# Altium PCB MCU.PcbDoc
Units mil, origin at the board's own origin, x right, y up, seen from the top; angles counter-clockwise.
Board outline 5055 x 2000 mil, 2 copper layers (Top Layer, Bottom Layer); 32 components, 26 nets, 142 pads, 0 vias.
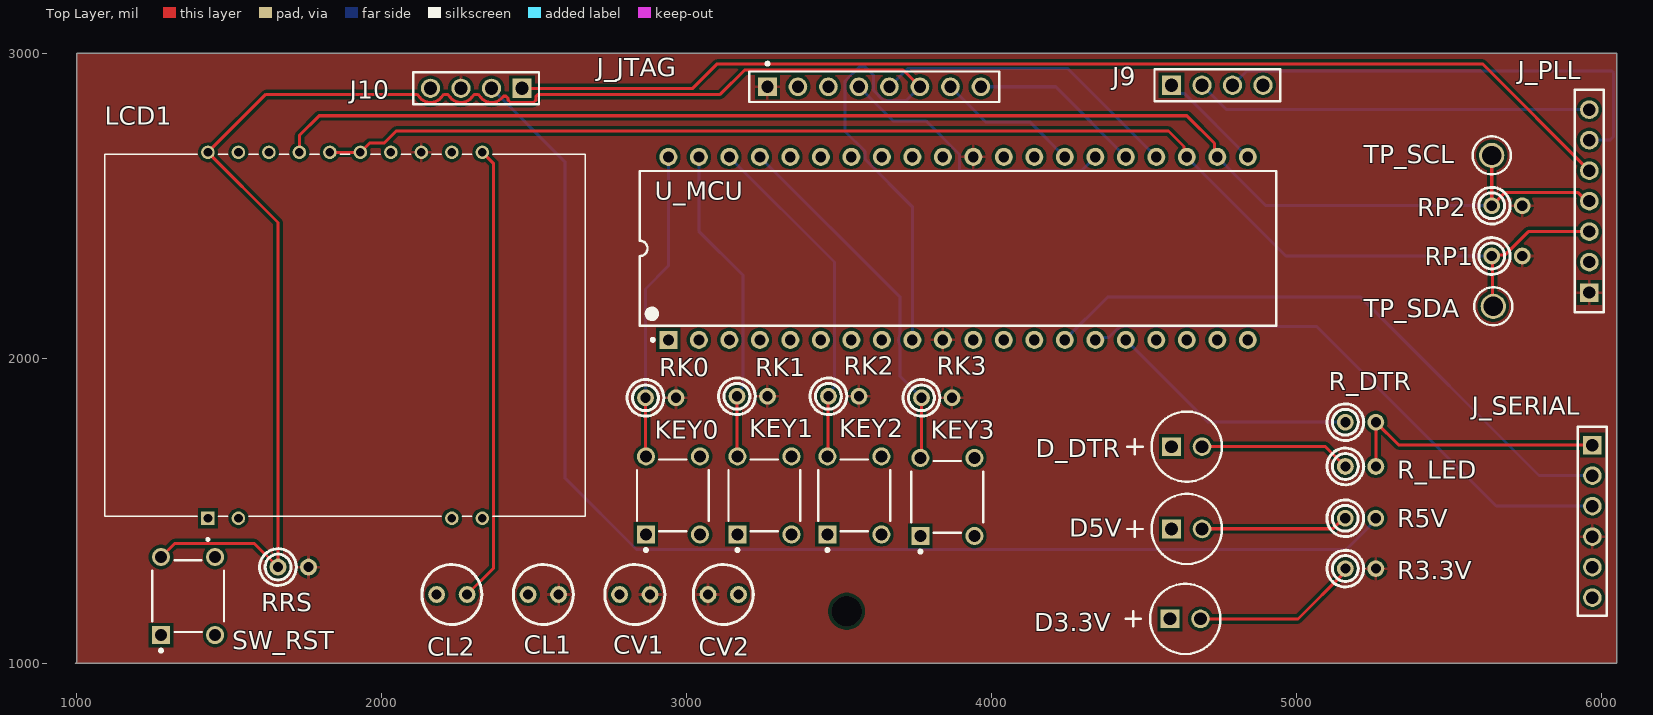
[diagram p0: Top Layer view]
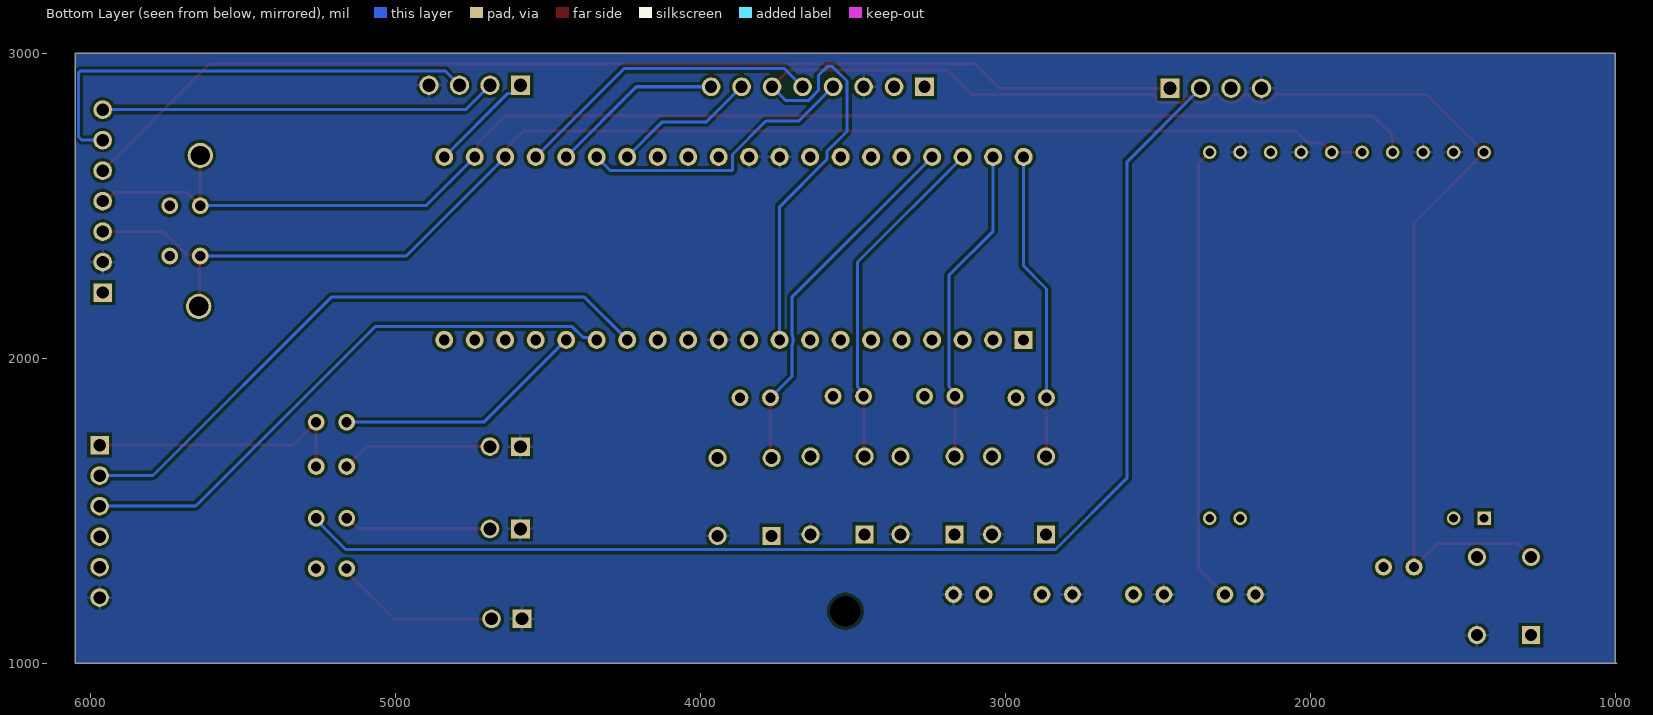
[diagram p1: Bottom Layer view, seen from below]

## Layer stack, top to bottom
Top Solder: solder mask 0.4, Solder Resist, Dk 3.5
Top Layer: signal copper 1.4
Dielectric 1: dielectric 12.6, FR-4, Dk 4.8
Bottom Layer: signal copper 1.4
Bottom Solder: solder mask 0.4, Solder Resist, Dk 3.5

## Board outline
1000,1000 1000,3000 6050,3000 6050,1000 995,1000

## Design rules (kind name [scope] priority, off if disabled: settings)
Clearance [All] p1: gap=10 ignorepadtopadclearanceinfootprint=FALSE except(0: Arc-Hole Track-Hole SMDPad-Hole THPad-Hole Via-Hole Fill-Hole Poly-Hole Region-Hole Text-Hole)
PolygonConnect [All] p1: connectstyle=Relief reliefconductorwidth=10 reliefentries=4 polygonreliefangle="90 Angle" airgapwidth=10
RoutingVias [All] p1: holewidth=28 width=50 viastyle="Through Hole" minholewidth=28 minwidth=50 maxholewidth=28 maxwidth=50
SolderMaskExpansion [All] p1: expansion=4 istentingtop=FALSE
Width [All] p1: maxlimit=10 minlimit=10 preferedwidth=10
30 further rules are at their usual default settings.

## Classes and differential pairs
component class U_Output: CL1 CL2 J_PLL LCD1 RP1 RP2 TP_SCL TP_SDA
component class U_Input: D_DTR J_SERIAL KEY0 KEY1 KEY2 KEY3 R_DTR R_LED RK0 RK1 RK2 RK3
component class MCU: CV1 CV2 D3.3V D5V J9 J10 J_JTAG R3.3V R5V RRS SW_RST U_MCU

## Components (designator, comment, footprint, x,y, rotation, side; value= is the part's Value field where it differs from the comment)
CL1 "Cap" RADIAL-0.1 2530,1225 r0 top value=1UF
CL2 "Cap" RADIAL-0.1 2230,1225 r0 top value=1UF
CV1 "Cap" RADIAL-0.1 2830,1225 r0 top value=0.1UF
CV2 "Cap" RADIAL-0.1 3120,1225 r180 top value=0.1UF
D3.3V "HLMP-3301" AVAG-HLMP-3301-2 4585,1145 r0 top
D5V "HLMP-3301" AVAG-HLMP-3301-2 4590,1440 r0 top
D_DTR "HLMP-3301" AVAG-HLMP-3301-2 4590,1710 r0 top
J9 "LO_F1" 61300411121 4740,2895 r0 top
J10 "LO_F2" 61300411121 2310,2885 r180 top
J_JTAG "PRPC008SAAN-RC" SLIN-PPPC081LFBN-RC_V 3615,2890 r0 top
J_PLL "PPTC071LFBN-RC" SMTC-SSQ-107-01-X-S 5960,2215 r90 top
J_SERIAL "SSW-106-02-T-S" SMTC-SSW-106-02-X-S 5970,1715 r270 top
KEY0 "1825910-6" TECO-1825910-6_V 2955,1550 r90 top
KEY1 "1825910-6" TECO-1825910-6_V 3255,1550 r90 top
KEY2 "1825910-6" TECO-1825910-6_V 3550,1550 r90 top
KEY3 "1825910-6" TECO-1825910-6_V 3855,1545 r90 top
LCD1 "EA_DOGS164W-A" LCD_EA_DOGS164W-A 1880,2075 r90 top
R3.3V "Res1" AXIAL-0.1-RES 5210,1310 r0 top value=1K
R5V "Res1" AXIAL-0.1-RES 5209.51,1475 r0 top value=1K
R_DTR "10" AXIAL-0.1-RES 5210,1790 r0 top
R_LED "Res1" AXIAL-0.1-RES 5210,1645 r0 top value=1K
RK0 "PULLUP" AXIAL-0.1-RES 2915,1870 r0 top value=10K
RK1 "PULLUP" AXIAL-0.1-RES 3215,1875 r0 top value=10K
RK2 "PULLUP" AXIAL-0.1-RES 3515,1875 r0 top value=10K
RK3 "PULLUP" AXIAL-0.1-RES 3820,1870 r0 top value=10K
RP1 "PULLUP" AXIAL-0.1-RES 5690,2335 r0 top value=1.8K
RP2 "PULLUP" AXIAL-0.1-RES 5690,2500 r0 top value=1.8K
RRS "PULLUP" AXIAL-0.1-RES 1710,1315 r0 top value=10K
SW_RST "1825910-6" TECO-1825910-6_V 1365,1220 r90 top
TP_SCL "5011" KSTN-5011_V 5640,2665 r90 top
TP_SDA "5010" KSTN-5010_V 5645,2170 r90 top
U_MCU "ATmega324A-PU" 40P6 3890,2360 r90 top

## Footprints (in the part's own frame and the unit in brackets; to place one, negate y for a bottom-side part, rotate by r counter-clockwise, add the part's x,y. Pads: shape width x height; smd on the part's side, far side on the other; paste and mask are expansions set on the pad)
40P6 [mm] "40-Pin Ceramic Dual In-Line Package (CerDIP)"
  rect 1.5x1.5 hole 0.9: 1(-7.62,24.13)
  round 1.5 hole 0.9: 2(-7.62,21.59) 3(-7.62,19.05) 4(-7.62,16.51) 5(-7.62,13.97) 6(-7.62,11.43) 7(-7.62,8.89) 8(-7.62,6.35) 9(-7.62,3.81) 10(-7.62,1.27) 11(-7.62,-1.27) 12(-7.62,-3.81) 13(-7.62,-6.35) 14(-7.62,-8.89) 15(-7.62,-11.43) 16(-7.62,-13.97) 17(-7.62,-16.51) 18(-7.62,-19.05) 19(-7.62,-21.59) 20(-7.62,-24.13) 21(7.62,-24.13) 22(7.62,-21.59) 23(7.62,-19.05) 24(7.62,-16.51) 25(7.62,-13.97) 26(7.62,-11.43) 27(7.62,-8.89) 28(7.62,-6.35) 29(7.62,-3.81) 30(7.62,-1.27) 31(7.62,1.27) 32(7.62,3.81) 33(7.62,6.35) 34(7.62,8.89) 35(7.62,11.43) 36(7.62,13.97) 37(7.62,16.51) 38(7.62,19.05) 39(7.62,21.59) 40(7.62,24.13)
  silkscreen extent -7.74,-26.5 6.45,26.5, body extent -7.05,-26.47 7.05,26.47, height 5.72
61300411121 [mm] "Pin Header, pitch 2.54 mm, THT, Vertical, single row, 4p"
  rect 1.6x1.6 hole 1.1: 1(-3.81,0)
  round 1.6 hole 1.1: 2(-1.27,0) 3(1.27,0) 4(3.81,0)
  silkscreen extent -5.23,-1.35 5.23,1.35, body extent -5.08,-1.27 5.08,1.27, height 8.57
AVAG-HLMP-3301-2 [mm] "THD, 2-Leads, Body Dia 5.85mm"
  rect 1.55x1.55 hole 1.05: 1(0,0)
  round 1.55 hole 1.05: 2(2.54,0)
  silkscreen extent -3.68,-2.92 4.19,2.92
AXIAL-0.1-RES [mm] "Axial Device, Thru-Hole; 2 Leads; 0.3 in Pin Spacing"
  round 1.4 hole 0.85: 1(-1.27,0) 2(1.27,0)
  silkscreen extent -2.8,-1.53 0.26,1.53
KSTN-5010_V [mm] "Test Point, Dia 3.17mm"
  round 2.1 hole 1.6: 1(0,0)
  silkscreen extent -1.58,-1.59 1.58,1.59, body extent -1.59,-1.59 1.59,1.59, height 8.13
KSTN-5011_V [mm] "Test Point, Dia 3.17mm"
  round 2.1 hole 1.6: 1(0,0)
  silkscreen extent -1.58,-1.59 1.58,1.59, body extent -1.59,-1.59 1.59,1.59, height 8.13
LCD_EA_DOGS164W-A [mm]
  rect 1.13x1.13 / inner round 1.13 / far side rect 1.13x1.13 hole 0.73: 1(-15.24,11.43)
  round 1.13 hole 0.73: 2(-15.24,8.89) 9(-15.24,-8.89) 10(-15.24,-11.43) 11(15.24,-11.43) 12(15.24,-8.89) 13(15.24,-6.35) 14(15.24,-3.81) 15(15.24,-1.27) 16(15.24,1.27) 17(15.24,3.81) 18(15.24,6.35) 19(15.24,8.89) 20(15.24,11.43)
  silkscreen extent -17.1,-20 15.09,20
RADIAL-0.1 [mm] "Axial Device, Thru-Hole; 2 Leads; 0.3 in Pin Spacing"
  round 1.4 hole 0.85: 1(-1.27,0) 2(1.27,0)
  silkscreen extent -2.5,-2.5 2.5,2.5
SLIN-PPPC081LFBN-RC_V [mm] "THD, 8-Leads, Body 20.82x2.54mm, Pitch 2.54mm"
  rect 1.55x1.55 hole 1.02: 1(-8.89,0)
  round 1.55 hole 1.02: 2(-6.35,0) 3(-3.81,0) 4(-1.27,0) 5(1.27,0) 6(3.81,0) 7(6.35,0) 8(8.89,0)
  silkscreen extent -10.41,-1.27 10.41,2.04, body extent -10.41,-1.27 10.41,1.27, height 8.5
SMTC-SSQ-107-01-X-S [mm] "SQ Post Socket, 1x7 Pins, Vertical, 2.54mm Pitch, Female"
  rect 1.55x1.55 hole 1.02: 1(0,0)
  round 1.55 hole 1.02: 2(2.54,0) 3(5.08,0) 4(7.62,0) 5(10.16,0) 6(12.7,0) 7(15.24,0)
  silkscreen extent -1.65,-1.2 16.89,1.2, body extent -1.52,-1.21 16.76,1.21, height 8.51
SMTC-SSW-106-02-X-S [mm] "SQ Post Socket, 1x6 Pins, Vertical, 2.54mm Pitch, Female"
  rect 1.55x1.55 hole 1.04: 1(0,0)
  round 1.55 hole 1.04: 2(2.54,0) 3(5.08,0) 4(7.62,0) 5(10.16,0) 6(12.7,0)
  silkscreen extent -1.53,-1.2 14.23,1.2, body extent -1.52,-1.21 14.22,1.21, height 8.51
TECO-1825910-6_V [mm] "Switch, 4-Leads, Body 5.99x5.99mm"
  rect 1.5x1.5 hole 0.99: 1(-3.25,2.25)
  round 1.5 hole 0.99: 2(3.25,2.25) 3(-3.25,-2.25) 4(3.25,-2.25)
  silkscreen extent -4.67,-2.99 2.99,3, body extent -3,-2.99 2.99,3, height 5

## Part data
CL1 CL2: library part "CAP ALUM 1UF 20% 100V RADIAL", "Capacitor", Manufacturer Part Number=ESE105M100AC3EA, Voltage Rating=100V, LatestRevisionDate=17-Jul-2002, LatestRevisionNote="Re-released for DXP Platform.", Published=8-Jun-2000, Publisher="Altium Limited"
CV1 CV2: library part "CAP CER 0.1UF 50V X7R RADIAL", "Capacitor", Manufacturer Part Number=K104M15X7RF5TH5, Voltage Rating=50V, LatestRevisionDate=17-Jul-2002, LatestRevisionNote="Re-released for DXP Platform.", Published=8-Jun-2000, Publisher="Altium Limited"
D3.3V D5V D_DTR: library part CMP-2000-06411-1, "T-1 3/4 (5 mm) Diffused LED Lamp, 1.9 V, -40 to 100 degC, 2-Pin THD, RoHS, Bulk", Emitting Color=Red, Forward Current=25mA, Forward Voltage=2.4V, Manufacturer=Avago, Operating Temp Range=-40Cto100C, Operating Temperature Classification=Industrial, Package Description="2-Pin Through Hole LED, Dia 5.85 mm", Package Type=T-13/4, Power Dissipation=85W, Reverse Voltage=5V, Test Current (It)=10mA, Chip Material=GaP, Datasheet URL=http://www.avagotech.com/docs/AV02-1558EN, Datasheet Version=03/2015, DELETED=Compliant, Dominant Wave Length=626nm, High Brightness=No, Lens Dimensions=5.08x5.08x8.3mm, Lens Type=ColoredDiffused, Lum Intensity=5.4mcd, Luminous Intensity=5.4mcd, Main Category=StandardLED, Manufacturer URL=http://www.avagotech.com/, Mounting=ThroughHole, Mounting Technology=ThroughHole, Number of  Elements=1, Package Reference=HLMP-3301, Packaging=TapeandReel, Peak Wavelength=635nm, Pin Count=2, Product Depth (mm)=6.1mm, Product Height (mm)=9.19mm, Product Length (mm)=6.1mm, Rad Hardened=No, Shape Type=Circular, Type=Uni-Color, Viewing Angle=60deg
J9 J10: library part CMP-1502-01064-1, "THT Vertical Pin Header WR-PHD, Pitch 2.54 mm, Single Row, 4 pins", Contact Resistance=20mOhm, Manufacturer="Wurth Elektronik", Operating Temperature=-40to105degC, Package Reference=61300411121, Rated Current=3A, Withstanding Voltage=500VAC, Working Voltage=250VAC, Datasheet URL=https://katalog.we-online.de/em/datasheet/6130xx11121.pdf, Gender=Male, Manufacturer URL=http://www.we-online.de, Mounting Technology=THT, Orientation=Vertical, Packaging=Bag, Part Number=61300411121, Pin Number=4, Pitch=2.54mm, Publisher=WurthElektronik, Row Number=Single
J_JTAG: library part CMP-1770-00002-1, "Female Header, Pitch 2.54 mm, 1 x 8 Position, Height 8.5 mm, Tail Length 3.2 mm, -40 to 105 degC, RoHS, Bulk", Case\Package=TO-252-3, Input Capacitance="350 pF", Max Operating Temperature="150 degC", Max Power Dissipation="2.5 W", Min Operating Temperature="-55 degC", Package Quantity=2500, ComponentLink1Description=Datasheet, ComponentLink1URL=http://sullinscorp.com/catalogs/101_PAGE114-115_.100_FEMALE_HDR.pdf, DatasheetVersion=Jan-15, Elements=1, Height="2.39 mm", Length="6.73 mm", Mount="Surface Mount", PackageDescription="Female Header, Pitch 2.54 mm, 1 x 8 Position, Height 8.5 mm, Tail Length 3.2 mm", PackageReference=PPPC081LFBN-RC, Packaging="Tape and Reel", Pins=3, Radiation Hardening=No, Rds On Max="115 mohm", REACH SVHC="No SVHC", RoHSCompliant=true, Typical Rise Time="90 ns", Width="6.22 mm"
J_PLL: library part CMP-1023-00284-1, "SQ Post Socket, Through-hole, Vertical, -55 to 125 degC, 2.54 mm Pitch, 7-Pin, Female, RoHS", Manufacturer=Samtec, PartNumber=SSQ-107-01-G-S, Temperature Range="-55 to 125 degC", ComponentLink1Description="Manufacturer URL", ComponentLink1URL=http://www.samtec.com, ComponentLink2Description=Datasheet, ComponentLink2URL=http://www.samtec.com/documents/webfiles/pdf/SSQ_TH.PDF, ComponentLink3Description="Package Specification", ComponentLink3URL=http://www.samtec.com/documents/webfiles/cpdf/SSQ-1XX-XX-XXX-X-XX-XXX-XX-X-MKT.pdf, DatasheetVersion=F-214, Mounting Technology=Through-hole, Orientation=Vertical, PackageDescription="Assembly, Socket Strip .025[0.64] SQ Tail", PackageReference=SSQ-107-01-X-S, PackageVersion="BD, 6/1987", Pitch="2.54 mm", RoHS=True
J_SERIAL: library part CMP-1023-00360-1, "SQ Post Socket, Through-hole, Vertical, -55 to 105 degC, 2.54mm Pitch, 6-Pin, Female, RoHS", Manufacturer=Samtec, Temperature Range="-55 to 105 degC", ComponentLink1Description="Manufacturer URL", ComponentLink1URL=http://www.samtec.com, ComponentLink2Description=Datasheet, ComponentLink2URL=http://www.samtec.com/documents/webfiles/pdf/SSW_TH.PDF, ComponentLink3Description="Package Specification", ComponentLink3URL=http://www.samtec.com/documents/webfiles/cpdf/SSW-1XX-XX-XXX-X-XX-XXX-XX-MKT.pdf, DatasheetVersion=F-214, Mounting Technology=Through-hole, Orientation=Vertical, PackageDescription="Assembly, Socket Strip .016 X .031 Tail", PackageReference=SSW-106-02-X-S, PackageVersion="CA, 6/1987", PartNumber=SSW-106-02-T-S, Pitch="2.54 mm", RoHS=True
KEY0 KEY1 KEY2 KEY3 SW_RST: library part CMP-1684-00021-1, "Tact Switch, SPST-NO, 0.05 A, -35 to 85 degC, 4-Pin THD, RoHS, Bulk", Actuator Color=Black, Contact Rating @ Voltage=0.05A@24VDC, Dielectric Strength=500VAC, Manufacturer="TE Connectivity", Maximum AC Voltage Rating=N/A, Maximum Contact Resistance=100mOhm, Maximum DC Voltage Rating=24V, Minimum Insulation Resistance=100MOhm, Operating Temperature=-35to85C, Package Description="4-Pin Through Hole Device, Body 5.99 x 5.99 mm, Pitch 6.5 mm", Package Reference=THD, Actuator Length=1.4mm, Actuator Material=PolybutyleneTerephthalate, Actuator Style=RoundButton, Base Material=N/A, Body Orientation=Straight, Bushing Type=Unthreaded, Contact Material=CopperAlloy, Contact Plating=Silver, Datasheet URL=http://www.te.com/commerce/DocumentDelivery/DDEController?Action=showdoc&DocId=Customer+Drawing%7F1825910%7FC9%7Fpdf%7FEnglish%7FENG_CD_1825910_C9.pdf%7F1825910-6, Datasheet Version="Rev. C9", Dimension=5.99x5mm, Electrical Life=100000Cycles, Family=1825910, Function=MomentaryContact, Housing Material=N/A, Illumination=N/R, Manufacturer URL=http://www.te.com, Mechanical Life=100000Cycles, Mounting=ThroughHole, Packaging=N/A, Part No=1825910-6, Pole Throw Configuration=SPST, Product Weight=N/A, RoHS=Yes, Seal Description=N/A, Seal Location=N/A, Switch Configuration=OFF(ON), Terminal Type=PCPins, Thread Size=N/R
LCD1: "Character LCD Display Module Transflective 5 x 32 Dots FSTN - Film Super-Twisted Nematic Without Backlight IÂ²C, SPI 40.00mm x 33.00mm x 2.60mm", Package=None, Availability="In Stock", Check_prices=https://www.snapeda.com/parts/EA%20DOGS164W-A/Focus+Display+Solutions/view-part/?ref=eda, MF="Display Visions", MP="EA DOGS164W-A", Price=None, Purchase-URL="https://pricing.snapeda.com/search/part/EA DOGS164W-A/?ref=eda", SnapEDA_Link=https://www.snapeda.com/parts/EA%20DOGS164W-A/Focus+Display+Solutions/view-part/?ref=snap
R3.3V R5V R_LED: library part "RES 1K OHM 5% 1/4W AXIAL", "Resistor", Manufacturer Part Number=CFR-25JB-52-1K, Power Rating=1/4W, Tolerance=0.05, LatestRevisionDate=17-Jul-2002, LatestRevisionNote="Re-released for DXP Platform.", Published=8-Jun-2000, Publisher="Altium Limited"
R_DTR: library part "RES 10 OHM 5% 1/4W AXIAL", "Resistor", Manufacturer Part Number=CFR-25JB-52-10R, Power Rating=1/4W, Tolerance=0.05, LatestRevisionDate=17-Jul-2002, LatestRevisionNote="Re-released for DXP Platform.", Published=8-Jun-2000, Publisher="Altium Limited"
RK0 RK1 RK2 RK3 RRS: library part "RES 10K OHM 5% 1/4W AXIAL", "Resistor", Manufacturer Part Number=CFR-25JB-52-10K, Power Rating=1/4W, Tolerance=0.05, LatestRevisionDate=17-Jul-2002, LatestRevisionNote="Re-released for DXP Platform.", Published=8-Jun-2000, Publisher="Altium Limited"
RP1 RP2: library part "RES 1.8K OHM 5% 1/4W AXIAL", "Resistor", Manufacturer Part Number=CFR-25JB-52-1K8, Power Rating=1/4W, Tolerance=0.05, LatestRevisionDate=17-Jul-2002, LatestRevisionNote="Re-released for DXP Platform.", Published=8-Jun-2000, Publisher="Altium Limited"
TP_SCL: library part CMP-1672-00003-4, "Test Point, Black, Through Hole, RoHS, Bulk", Colour=Black, Manufacturer=Keystone, Package Quantity=100, ComponentLink1Description="Manufacturer URL", ComponentLink1URL=http://www.keyelco.com/, ComponentLink2Description=Datasheet, ComponentLink2URL=http://www.keyelco.com/product-pdf.cfm?p=1320, Contact Material=Bronze, Contact Plating=Silver, DatasheetVersion="Rev. F, 12/2013", Height="8.12 mm", Mount="Through Hole", Mounting Technology="Through Hole", PackageDescription="1-Pin Through Hole Device, Dia 3.17 mm", PackageReference=5011, Packaging=Bulk, Pins=1, REACH SVHC="No SVHC", RoHSCompliant=true
TP_SDA: library part CMP-1672-00002-4, "Test Point, Red, Through Hole, RoHS, Bulk", Colour=Red, Manufacturer=Keystone, Package Quantity=100, ComponentLink1Description="Manufacturer URL", ComponentLink1URL=http://www.keyelco.com/, ComponentLink2Description=Datasheet, ComponentLink2URL=http://www.keyelco.com/product-pdf.cfm?p=1319, Contact Material=Bronze, Contact Plating=Silver, DatasheetVersion="Rev. F, 12/2013", Height="8.12 mm", Mount="Through Hole", Mounting Technology="Through Hole", PackageDescription="1-Pin Through Hole Device, Dia 3.17 mm", PackageReference=5010, Packaging=Bulk, Pins=1, REACH SVHC="No SVHC", RoHSCompliant=true
U_MCU: library part CMP-0095-00016-2, "8-bit AVR Microcontroller, 32KB Flash, 1KB EEPROM, 2KB SRAM, 40-pin PDIP, Industrial Grade (-40°C to 85°C)", Code_JEDEC=MS-011-AC, ComponentLink1Description="Manufacturer URL", ComponentLink1URL=http://www.atmel.com/, ComponentLink2Description="ATmega164A/164PA/324A/324PA/644A/644PA/1284/1284P Datasheet", ComponentLink2URL=http://www.atmel.com/dyn/resources/prod_documents/doc8272.pdf, ComponentLink3Description="ATmega164A/164PA/324A/324PA/644A/644PA/1284/1284P Summary", ComponentLink3URL=http://www.atmel.com/dyn/resources/prod_documents/8272S.pdf, DatasheetVersion="revC, Jun-2011", PackageDescription="40-lead (0.600\"/15.24mm Wide) Plastic Dual Inline Package (PDIP)", PackageReference=40P6, PackageVersion="revB, Sep-2001", RevisionNote="DatasheetVersion & Sch pin names updated. URLs added."

## Free pads (board coordinates)
  round 60 hole 100: MOUNTING_HOLE(3524.8,1170)

## Nets (pads, with @x,y where several pads share a name; then routed paths per layer and width w, separated by ;. In a path a pad name is that pad's centre, name@x,y a point inside that pad or via, vN(x,y) a via of type N, cw(c..) or ccw(c..) an arc to the next point about the centre after c; other vN are vias at no path point)
+3.3V: CL1.2 CV1.2 CV2.2 J10.3 J_JTAG.1 J_PLL.1 J_SERIAL.4 LCD1.13 R3.3V.2 RK0.2 RK1.2 RK2.2 RK3.2 RP1.2 RP2.2 RRS.2 U_MCU.10 U_MCU.30
+5V: J10.2 R5V.2 | length 4179
  Bottom Layer w10: J10.2 2600.41,2644.59 2600.41,1607.79 2835.68,1372.52 5162.52,1372.52 5259.51,1469.51 R5V.2
/TXEN: J9.1 U_MCU.21 | length 347.3
  Bottom Layer w10: J9.1 4616.5,2868.5 4631.5,2868.5 U_MCU.21
DTR: R_DTR.1 U_MCU.16 | length 831.8
  Bottom Layer w10: U_MCU.16 4710,1790 R_DTR.1
GND: CL1.1 CL2.1 CV1.1 CV2.1 D3.3V.1 D5V.1 D_DTR.1 J9.4 J10.4 J_JTAG.3 J_PLL.2 J_SERIAL.6 KEY0.3 KEY1.3 KEY2.3 KEY3.3 LCD1.12 LCD1.14 LCD1.18 LCD1.19 SW_RST.3 U_MCU.11 U_MCU.31 U_MCU.32
LO_F1_0: J9.2 J_PLL.7 | length 1303.1
  Bottom Layer w10: J9.2 4770,2815 J_PLL.7
LO_F1_90: J9.3 J_PLL.6 | length 1564.8
  Bottom Layer w10: J9.3 4836.5,2941.5 6033.83,2941.5 6039.69,2935.64 6039.69,2726.72 6027.97,2715 J_PLL.6
LO_F2: J10.1 J_PLL.5 | length 3678.1
  Top Layer w10: J10.1 3020,2885 3100,2965 5610,2965 J_PLL.5
NetCL2_2: CL2.2 LCD1.11 | length 1501.6
  Top Layer w10: CL2.2 2367.24,1312.24 2367.24,2637.76 LCD1.11
NetD3.3V_2: D3.3V.2 R3.3V.1 | length 549.2
  Top Layer w10: D3.3V.2 5005,1145 5160,1300 R3.3V.1
NetD5V_2: D5V.2 R5V.1 | length 484
  Top Layer w10: D5V.2 4690.64,1440.64 5119.65,1440.64 5154.01,1475 R5V.1
NetD_DTR_2: D_DTR.2 R_LED.1 | length 496.9
  Top Layer w10: D_DTR.2 5095,1710 R_LED.1
NetJ_SERIAL_1: J_SERIAL.1 R_DTR.2 R_LED.2 | length 886.1
  Top Layer w10: R_LED.2 R_DTR.2 5335,1715 J_SERIAL.1
PA0: KEY0.2 RK0.1 U_MCU.40 | length 1013.7
  Top Layer w10: RK0.1 2865.71,1869.29 2865.71,1678.66 KEY0.2
  Bottom Layer w10: RK0.1 2865,2226.97 2940,2301.97 U_MCU.40
PA1: KEY1.2 RK1.1 U_MCU.39 | length 1050.6
  Top Layer w10: RK1.1 3165.71,1874.29 3165.71,1678.66 KEY1.2
  Bottom Layer w10: U_MCU.39 3040,2416.4 3184.53,2271.88 3184.53,1906.74 3165,1887.21 RK1.1
PA2: KEY2.2 RK2.1 U_MCU.38 | length 1134.3
  Top Layer w10: KEY2.2 3463.21,1679.74 3463.21,1873.21 RK2.1
  Bottom Layer w10: U_MCU.38 3484.53,2315.47 3484.53,1906.74 3465,1887.21 RK2.1
PA3: KEY3.2 RK3.1 U_MCU.37 | length 1209.4
  Top Layer w10: KEY3.2 3770,1676.54 RK3.1
  Bottom Layer w10: U_MCU.37 3697.07,2202.93 3700,2200 3700,2079.56 ccw(c3740,2060) 3700,2040.44 3700,1940 3702.93,1937.07 RK3.1
RST: J_JTAG.6 LCD1.20 RRS.1 SW_RST.2 U_MCU.9 | length 5742.9
  Top Layer w10: SW_RST.2 1320.94,1392.48 1582.52,1392.48 RRS.1 1660,2445 LCD1.20 1620,2865 2116.27,2865 2119.2,2862.07 2120.04,2861.23 ccw(c2160,2885) 2199.96,2861.23 2200.8,2862.07 2203.73,2865 2216.27,2865 2219.2,2862.07 2220.04,2861.23 ccw(c2260,2885) 2299.96,2861.23 2300.8,2862.07 2303.73,2865 2316.27,2865 2319.2,2862.07 2320.04,2861.23 ccw(c2360,2885) 2396.09,2855.68 2396.43,2856.02 ; 2396.43,2856.03 2399.36,2858.96 2403.5,2858.96 2407.65,2858.96 2410.57,2856.03 ; 2410.58,2856.03 2413.5,2853.1 2413.5,2847.29 2422.29,2838.5 2497.71,2838.5 2506.5,2847.29 2506.5,2859.14 2512.35,2865 3110,2865 3190,2945 3710,2945 J_JTAG.6
  Bottom Layer w10: U_MCU.9 3740,2497.03 3584.53,2652.5 3584.53,2678.44 3519.49,2743.48 3519.49,2908.85 3566.49,2955.86 3584.14,2955.86 3613.07,2926.93 3613.07,2877.56 3646.15,2844.49 3719.49,2844.49 J_JTAG.6
RXD: J_SERIAL.3 U_MCU.15 | length 1892.6
  Bottom Layer w10: U_MCU.15 4347.5,2067.5 4384.53,2067.5 4421.56,2104.53 5065.47,2104.53 5655,1515 J_SERIAL.3
SCL: J_PLL.4 LCD1.17 RP2.1 TP_SCL.1 U_MCU.22 | length 4648.7
  Top Layer w10: LCD1.17 1730,2730 1795,2795 4640,2795 4730.61,2704.39 4730.61,2669.39 U_MCU.22 ; TP_SCL.1 RP2.1 5682.56,2542.56 5923.2,2542.56 5950.75,2515 J_PLL.4
  Bottom Layer w10: U_MCU.22 4900,2500 RP2.1
SDA: J_PLL.3 LCD1.15 LCD1.16 RP1.1 TP_SDA.1 U_MCU.23 | length 4543.7
  Top Layer w10: LCD1.16 LCD1.15 1960,2705 2007.33,2705 2047.33,2745 4580,2745 4631.01,2693.99 4631.01,2668.99 U_MCU.23 ; TP_SDA.1 5642.5,2172.5 5642.5,2332.5 RP1.1 5642.75,2337.75 5682.56,2337.75 5759.81,2415 J_PLL.3
  Bottom Layer w10: U_MCU.23 4965,2335 RP1.1
TCK: J_JTAG.5 U_MCU.24 | length 1020
  Bottom Layer w10: J_JTAG.5 3725,2950 4250,2950 U_MCU.24
TDI: J_JTAG.7 U_MCU.27 | length 470.3
  Bottom Layer w10: J_JTAG.7 3980.19,2774.81 4125.19,2774.81 U_MCU.27
TDO: J_JTAG.4 U_MCU.26 | length 937.9
  Bottom Layer w10: J_JTAG.4 3677.27,2777.73 3785.24,2777.73 3895,2667.97 3895,2615.47 4295.47,2615.47 U_MCU.26
TMS: J_JTAG.8 U_MCU.25 | length 570.3
  Bottom Layer w10: J_JTAG.8 4210,2890 U_MCU.25
TXD: J_SERIAL.2 U_MCU.14 | length 2030.3
  Bottom Layer w10: U_MCU.14 4380,2200 5210,2200 5795,1615 J_SERIAL.2
pads on no net: J_JTAG.2 J_SERIAL.5 KEY0.1 KEY0.4 KEY1.1 KEY1.4 KEY2.1 KEY2.4 KEY3.1 KEY3.4 LCD1.1 LCD1.2 LCD1.9 LCD1.10 SW_RST.1 SW_RST.4 U_MCU.1 U_MCU.2 U_MCU.3 U_MCU.4 U_MCU.5 U_MCU.6 U_MCU.7 U_MCU.8 U_MCU.12 U_MCU.13 U_MCU.17 U_MCU.18 U_MCU.19 U_MCU.20 U_MCU.28 U_MCU.29 U_MCU.33 U_MCU.34 U_MCU.35 U_MCU.36

## Polygon pours and split planes (outlines as drawn)
GND on Bottom Layer "GND" (solid, pour order 8): 1000,3000 6050,3000 6050,1000 1000,1000
+3.3V on Top Layer "+3.3V" (solid, pour order 11): 1000,3000 6050,3000 6050,1000 1000,1000